# Altium PCB Tfinal.PcbDoc (part 2 of 3)
Units mm, origin at the board's own origin, x right, y up, seen from the top; angles counter-clockwise.
Board outline 152.4 x 101.6 mm, 2 copper layers (Top Layer, Bottom Layer); 134 components, 112 nets, 404 pads, 12 vias.
Unrouted connection lines stored in the file: 100.
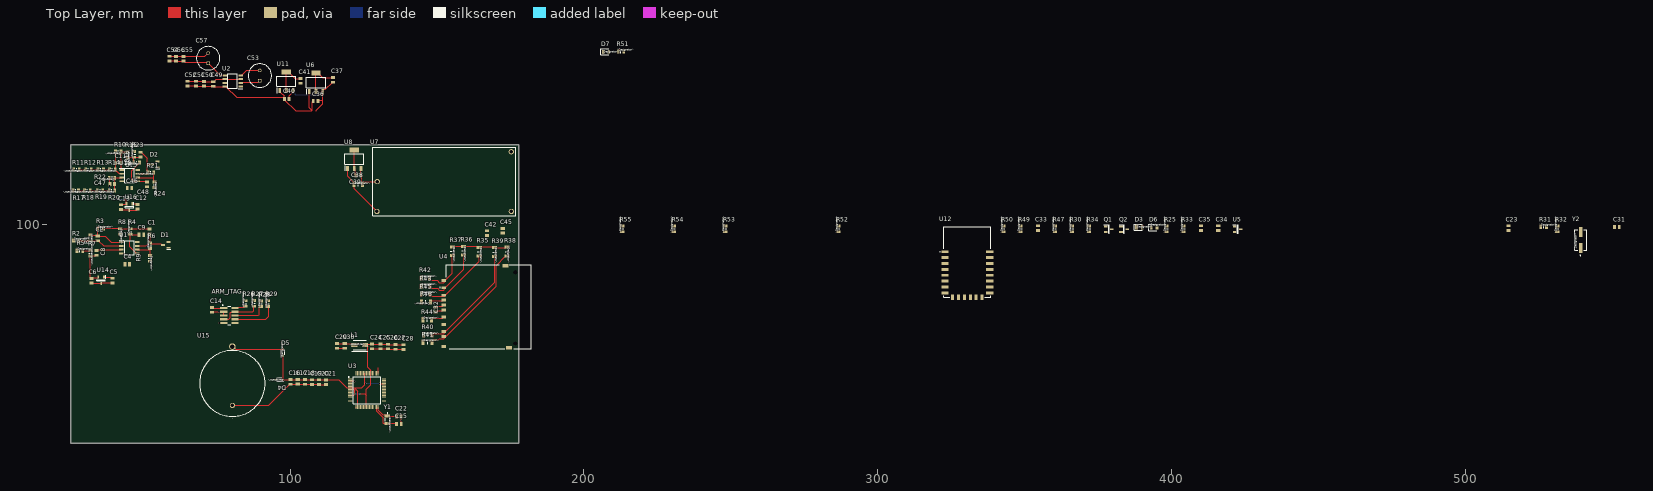
[diagram p0: Top Layer view]

## Part data (continued)
R1 R4 R7 R10 R16 R22: "YAGEO - RC0805FR-074K7L - SMD  0805 [2012 Metric], 4.7 kohm,  125 mW", Case/Package=0805, Case Code (Metric)=2012, Manufacturer 1=Yageo, Max Operating Temperature=155°C, Max Power Dissipation=125mW, Min Operating Temperature=-55°C, Package Quantity=5000, Resistance=4.7kR, Resistance Tolerance=1%, Resistor Type="Thick Film", Supplier Part Number 1=6181408, Temperature Coefficient=100ppm/°C, Voltage Rating=150V, Case Code (Imperial)=0805, ComponentLink1Description=https://datasheet.ciiva.com/11808/0900766b8106beab-11808155.pdf?src-supplier=RSComponents, ComponentLink1URL=https://datasheet.ciiva.com/11808/0900766b8106beab-11808155.pdf?src-supplier=RSComponents, ComponentLink2Description=https://datasheet.ciiva.com/6547/pyu-r-int-thick-7-6547263.pdf?src-supplier=Digi-Key, ComponentLink2URL=https://datasheet.ciiva.com/6547/pyu-r-int-thick-7-6547263.pdf?src-supplier=Digi-Key, ComponentLink3Description=https://datasheet.ciiva.com/7941/444164-7941806.pdf?src-supplier=Element14, ComponentLink3URL=https://datasheet.ciiva.com/7941/444164-7941806.pdf?src-supplier=Element14, ComponentLink4Description=https://datasheet.ciiva.com/46447/444164-46447583.pdf?src-supplier=Element14, ComponentLink4URL=https://datasheet.ciiva.com/46447/444164-46447583.pdf?src-supplier=Element14, ComponentLink5Description=https://datasheet.ciiva.com/7941/444164-7941804.pdf?src-supplier=Element14, ComponentLink5URL=https://datasheet.ciiva.com/7941/444164-7941804.pdf?src-supplier=Element14, ComponentLink6Description=https://datasheet.ciiva.com/7941/1686128-7941805.pdf?src-supplier=Element14, ComponentLink6URL=https://datasheet.ciiva.com/7941/1686128-7941805.pdf?src-supplier=Element14, Construction=Rectangular, Depth=1.25mm, Features="Moisture Resistant", Height=0.024inch, Lead Free="Lead Free", Length=0.079inch, Manufacturer Part Number 1=RC0805FR-074K7L, Military Standard=Not, Number of Pins=2, Number of Terminations=2, Packaging="Tape and Reel", Power Rating=125mW, Pricing 1="5000=0,00500 (GBP)", REACH SVHC="No SVHC", RoHS=Yes, RoHS Compliant=Yes, Series=RC, Size Code=0805, Stock 1=55000, Supplier 1=RSComponents, Technology="THICK FILM", Termination=SMD/SMT, Tolerance=1%, Voltage Rating (DC)=150V, Width=0.049inch
R2 R5: "Res Thick Film smd 0805 3.16K Ohm 1% 0.125W(1/8W)", Case/Package=0805, Case Code (Metric)=2012, Manufacturer 1=Yageo, Max Operating Temperature=155°C, Max Power Dissipation=125mW, Min Operating Temperature=-55°C, Package Quantity=1, Resistance=3.16kR, Resistor Type="Thick Film", Supplier Part Number 1=311-3.16KCRCT-ND, Temperature Coefficient=100ppm/°C, Tolerance=1%, Voltage Rating=150V, Case Code (Imperial)=0805, ComponentLink1Description=https://datasheet.ciiva.com/2457/pyu-r-int-thick-7-2457284.pdf?src-supplier=Digi-Key, ComponentLink1URL=https://datasheet.ciiva.com/2457/pyu-r-int-thick-7-2457284.pdf?src-supplier=Digi-Key, ComponentLink2Description=https://datasheet.ciiva.com/2457/pyu-r-int-thick-7-2457285.pdf?src-supplier=Digi-Key, ComponentLink2URL=https://datasheet.ciiva.com/2457/pyu-r-int-thick-7-2457285.pdf?src-supplier=Digi-Key, ComponentLink3Description=https://datasheet.ciiva.com/2457/pyu-r-int-thick-7-2457286.pdf?src-supplier=Digi-Key, ComponentLink3URL=https://datasheet.ciiva.com/2457/pyu-r-int-thick-7-2457286.pdf?src-supplier=Digi-Key, ComponentLink4Description=https://datasheet.ciiva.com/12577/rc0805-12577436.pdf?src-supplier=Mouser, ComponentLink4URL=https://datasheet.ciiva.com/12577/rc0805-12577436.pdf?src-supplier=Mouser, Construction=Rectangular, Depth=1.25mm, Features="Moisture Resistant", Height=0.024inch, Lead Free="Lead Free", Length=2mm, Manufacturer Part Number 1=RC0805FR-073K16L, Military Standard=Not, Number of Terminations=2, Packaging="Tape and Reel", Power Rating=125mW, Pricing 1="1=0,10000, 10=0,04200, 100=0,01690, 1000=0,00759, 2500=0,00659 (USD)", RoHS=Yes, RoHS Compliant=Yes, Series=RC, Size Code=0805, Stock 1=24399, Supplier 1=Digi-Key, Termination=SMD/SMT, Voltage Rating (DC)=150V, Weight=0.000194oz, Width=0.049inch
R3 R8 R15 R23: "Res Thick Film smd 0805 9.31K Ohm 1% 0.125W(1/8W)", Case/Package=0805, Case Code (Metric)=2012, Manufacturer 1=Yageo, Max Operating Temperature=155°C, Max Power Dissipation=125mW, Min Operating Temperature=-55°C, Package Quantity=1, Resistance=9.31kR, Resistor Type="Thick Film", Supplier Part Number 1=311-9.31KCRCT-ND, Temperature Coefficient=100ppm/°C, Tolerance=1%, Voltage Rating=150V, Case Code (Imperial)=0805, ComponentLink1Description=https://datasheet.ciiva.com/2457/pyu-r-int-thick-7-2457635.pdf?src-supplier=Digi-Key, ComponentLink1URL=https://datasheet.ciiva.com/2457/pyu-r-int-thick-7-2457635.pdf?src-supplier=Digi-Key, ComponentLink2Description=https://datasheet.ciiva.com/2457/pyu-r-int-thick-7-2457636.pdf?src-supplier=Digi-Key, ComponentLink2URL=https://datasheet.ciiva.com/2457/pyu-r-int-thick-7-2457636.pdf?src-supplier=Digi-Key, ComponentLink3Description=https://datasheet.ciiva.com/2457/pyu-r-int-thick-7-2457637.pdf?src-supplier=Digi-Key, ComponentLink3URL=https://datasheet.ciiva.com/2457/pyu-r-int-thick-7-2457637.pdf?src-supplier=Digi-Key, ComponentLink4Description=https://datasheet.ciiva.com/17074/rc0805-17074679.pdf?src-supplier=Future+Electronics, ComponentLink4URL=https://datasheet.ciiva.com/17074/rc0805-17074679.pdf?src-supplier=Future+Electronics, Construction=Rectangular, Contact Plating=Tin,Lead,Matte, Depth=1.25mm, Features="Moisture Resistant", Height=0.024inch, Lead Free="Lead Free", Length=2mm, Manufacturer Part Number 1=RC0805FR-079K31L, Military Standard=Not, Number of Terminations=2, Packaging="Tape and Reel", Power Rating=125mW, Pricing 1="1=0,10000, 10=0,04200, 100=0,01690, 1000=0,00759, 2500=0,00659 (USD)", Radiation Hardening=No, RoHS=Yes, RoHS Compliant=Yes, Series=RC, Size Code=0805, Stock 1=10181, Supplier 1=Digi-Key, Termination=SMD/SMT, Voltage Rating (DC)=150V, Width=1.25mm
R6 R9 R21 R24: "RES SMD  0805 10K OHM 1% 1/8W", Case/Package=0805, Case Code (Metric)=2012, Manufacturer 1=Yageo, Max Operating Temperature=155°C, Max Power Dissipation=125mW, Min Operating Temperature=-55°C, Package Quantity=1, Resistance=10kR, Resistance Tolerance=1%, Resistor Type="Thick Film", Supplier Part Number 1=311-10.0KCRCT-ND, Temperature Coefficient=100ppm/°C, Voltage Rating=150V, Case Code (Imperial)=0805, ComponentLink1Description=https://datasheet.ciiva.com/11808/0900766b8106beab-11808151.pdf?src-supplier=RSComponents, ComponentLink1URL=https://datasheet.ciiva.com/11808/0900766b8106beab-11808151.pdf?src-supplier=RSComponents, ComponentLink2Description=https://datasheet.ciiva.com/12669/rc0805-12669688.pdf?src-supplier=Mouser, ComponentLink2URL=https://datasheet.ciiva.com/12669/rc0805-12669688.pdf?src-supplier=Mouser, ComponentLink3Description=https://datasheet.ciiva.com/2456/pyu-r-int-thick-7-2456974.pdf?src-supplier=Digi-Key, ComponentLink3URL=https://datasheet.ciiva.com/2456/pyu-r-int-thick-7-2456974.pdf?src-supplier=Digi-Key, ComponentLink4Description=https://datasheet.ciiva.com/2456/pyu-r-int-thick-7-2456972.pdf?src-supplier=Digi-Key, ComponentLink4URL=https://datasheet.ciiva.com/2456/pyu-r-int-thick-7-2456972.pdf?src-supplier=Digi-Key, ComponentLink5Description=https://datasheet.ciiva.com/2456/pyu-r-int-thick-7-2456973.pdf?src-supplier=Digi-Key, ComponentLink5URL=https://datasheet.ciiva.com/2456/pyu-r-int-thick-7-2456973.pdf?src-supplier=Digi-Key, ComponentLink6Description=https://datasheet.ciiva.com/16747/rc0805-16747087.pdf?src-supplier=Future+Electronics, ComponentLink6URL=https://datasheet.ciiva.com/16747/rc0805-16747087.pdf?src-supplier=Future+Electronics, ComponentLink7Description=https://datasheet.ciiva.com/46447/444164-46447563.pdf?src-supplier=Element14, ComponentLink7URL=https://datasheet.ciiva.com/46447/444164-46447563.pdf?src-supplier=Element14, Construction=Rectangular, Depth=1.25mm, Features="Moisture Resistant", Height=0.024inch, Lead Free="Lead Free", Length=2mm, Manufacturer Part Number 1=RC0805FR-0710KL, Military Standard=Not, Number of Terminations=2, Packaging="Tape and Reel", Power Rating=125mW, Pricing 1="1=0,10000, 10=0,04200, 100=0,01690, 1000=0,00759, 2500=0,00659 (USD)", REACH SVHC=Unknown, RoHS=Yes, RoHS Compliant=Yes, Series=RC, Size Code=0805, Stock 1=7813114, Supplier 1=Digi-Key, Technology="THICK FILM", Termination=SMD/SMT, Tolerance=1%, Width=0.049inch
R11 R12 R13 R17 R18 R19: "RES SMD 0805 412K OHM 1% 1/8W", Case/Package=0805, Case Code (Metric)=2012, Manufacturer 1=Yageo, Max Operating Temperature=155°C, Max Power Dissipation=125mW, Min Operating Temperature=-55°C, Resistance=412kR, Resistor Type="Thick Film", Supplier Part Number 1=311-412KCRCT-ND, Temperature Coefficient=100ppm/°C, Tolerance=1%, Voltage Rating=150V, Case Code (Imperial)=0805, ComponentLink1Description=http://www.mouser.com/ds/2/447/Yageo_08112016_RC0805-968729.pdf?src-supplier=Mouser, ComponentLink1URL=http://www.mouser.com/ds/2/447/Yageo_08112016_RC0805-968729.pdf?src-supplier=Mouser, ComponentLink2Description=http://components.arrow.com/part/dataview/0323_03542655?src-supplier=Arrow+Europe, ComponentLink2URL=http://components.arrow.com/part/dataview/0323_03542655?src-supplier=Arrow+Europe, ComponentLink3Description=http://www.yageo.com/documents/recent/PYu-RC_Group_51_RoHS_L_9.pdf?src-supplier=Digi-Key, ComponentLink3URL=http://www.yageo.com/documents/recent/PYu-RC_Group_51_RoHS_L_9.pdf?src-supplier=Digi-Key, ComponentLink4Description=http://www.yageo.com/documents/recent/PYu-RC_Group_51_RoHS_L_10.pdf?src-supplier=Digi-Key, ComponentLink4URL=http://www.yageo.com/documents/recent/PYu-RC_Group_51_RoHS_L_10.pdf?src-supplier=Digi-Key, ComponentLink5Description=http://www.yageo.com/documents/recent/PYu-RC0805_51_RoHS_L_v5.pdf?src-supplier=Future+Electronics, ComponentLink5URL=http://www.yageo.com/documents/recent/PYu-RC0805_51_RoHS_L_v5.pdf?src-supplier=Future+Electronics, Construction=Rectangular, Depth=1.25mm, Features="Moisture Resistant", Height=0.5mm, Lead Free="Lead Free", Length=2mm, Manufacturer Part Number 1=RC0805FR-07412KL, Military Standard=Not, Number of Terminations=2, Packaging="Tape and Reel", Power Rating=125mW, Pricing 1="1=0,10000, 10=0,04200, 100=0,01690, 1000=0,00759, 2500=0,00659 (USD)", RoHS=Yes, RoHS Compliant=Yes, Series=RC, Stock 1=1412, Supplier 1=Digi-Key, Technology="THICK FILM", Termination=SMD/SMT, Voltage Rating (DC)=150V, Width=1.25mm, Working Voltage=150V
R14 R20: "Res Thick Film smd 0805 15.8K Ohm 1% 0.125W(1/8W)", Case/Package=0805, Case Code (Metric)=2012, Manufacturer 1=Yageo, Max Operating Temperature=155°C, Max Power Dissipation=125mW, Min Operating Temperature=-55°C, Resistance=15.8kR, Resistor Type="Thick Film", Supplier Part Number 1=311-15.8KCRCT-ND, Temperature Coefficient=100ppm/°C, Tolerance=1%, Voltage Rating=150V, Case Code (Imperial)=0805, ComponentLink1Description=https://datasheet.ciiva.com/5558/rc0805-5558198.pdf?src-supplier=Mouser, ComponentLink1URL=https://datasheet.ciiva.com/5558/rc0805-5558198.pdf?src-supplier=Mouser, ComponentLink2Description=https://datasheet.ciiva.com/17054/rc0805-17054650.pdf?src-supplier=Future+Electronics, ComponentLink2URL=https://datasheet.ciiva.com/17054/rc0805-17054650.pdf?src-supplier=Future+Electronics, Construction=Rectangular, Contact Plating=Tin,Matte,Lead, Depth=1.25mm, Features="Moisture Resistant", Lead Free="Lead Free", Length=2mm, Manufacturer Part Number 1=RC0805FR-0715K8L, Military Standard=Not, Number of Terminations=2, Packaging="Tape and Reel", Power Rating=125mW, Pricing 1="1=0,10000, 10=0,04200, 100=0,01690, 1000=0,00759, 2500=0,00659 (USD)", Radiation Hardening=No, RoHS=Yes, RoHS Compliant=Yes, Series=RC, Size Code=0805, Stock 1=65412, Supplier 1=Digi-Key, Termination=SMD/SMT, Voltage Rating (DC)=150V
R25 R33 R51: "Res Thick Film smd 0805 130 Ohm 1% 0.125W(", Case/Package=0805, Case Code (Metric)=2012, Manufacturer 1=Yageo, Max Operating Temperature=155°C, Max Power Dissipation=125mW, Min Operating Temperature=-55°C, Package Quantity=1, Resistance=130R, Resistor Type="Thick Film", Supplier Part Number 1=311-130CRCT-ND, Temperature Coefficient=100ppm/°C, Tolerance=1%, Voltage Rating=150V, Case Code (Imperial)=0805, ComponentLink1Description=https://datasheet.ciiva.com/11808/0900766b8106beab-11808374.pdf?src-supplier=RSComponents, ComponentLink1URL=https://datasheet.ciiva.com/11808/0900766b8106beab-11808374.pdf?src-supplier=RSComponents, ComponentLink2Description=https://datasheet.ciiva.com/2457/pyu-r-int-thick-7-2457546.pdf?src-supplier=Digi-Key, ComponentLink2URL=https://datasheet.ciiva.com/2457/pyu-r-int-thick-7-2457546.pdf?src-supplier=Digi-Key, ComponentLink3Description=https://datasheet.ciiva.com/2457/pyu-r-int-thick-7-2457547.pdf?src-supplier=Digi-Key, ComponentLink3URL=https://datasheet.ciiva.com/2457/pyu-r-int-thick-7-2457547.pdf?src-supplier=Digi-Key, ComponentLink4Description=https://datasheet.ciiva.com/2457/pyu-r-int-thick-7-2457545.pdf?src-supplier=Digi-Key, ComponentLink4URL=https://datasheet.ciiva.com/2457/pyu-r-int-thick-7-2457545.pdf?src-supplier=Digi-Key, ComponentLink5Description=https://datasheet.ciiva.com/15189/getdatasheetpartid-326400-15189899.pdf?src-supplier=Verical, ComponentLink5URL=https://datasheet.ciiva.com/15189/getdatasheetpartid-326400-15189899.pdf?src-supplier=Verical, ComponentLink6Description=https://datasheet.ciiva.com/16746/rc0805-16746879.pdf?src-supplier=Future+Electronics, ComponentLink6URL=https://datasheet.ciiva.com/16746/rc0805-16746879.pdf?src-supplier=Future+Electronics, Construction=Rectangular, Depth=1.25mm, Features="Moisture Resistant", Height=0.5mm, Lead Free="Lead Free", Length=2mm, Manufacturer Part Number 1=RC0805FR-07130RL, Military Standard=Not, Mount="Surface Mount", Number of Terminations=2, Packaging="Tape and Reel", Power Rating=125mW, Pricing 1="1=0,10000, 10=0,04200, 100=0,01690, 1000=0,00759, 2500=0,00659 (USD)", RoHS=Yes, RoHS Compliant=Yes, Series=RC, Size Code=0805, Stock 1=289647, Supplier 1=Digi-Key, Technology="THICK FILM", Termination=SMD/SMT, Voltage Rating (DC)=150V, Width=0.049inch
R26 R27 R28 R29 R47: "Thick Film Resistors - SMD 0805  100K ohm 5% 1/8W", Case/Package=0805, Case Code (Metric)=2012, Manufacturer 1=Yageo, Max Operating Temperature=155°C, Max Power Dissipation=125mW, Min Operating Temperature=-55°C, Resistance=100kR, Resistor Type="Thick Film", Supplier Part Number 1=YAG3756CT-ND, Temperature Coefficient=100ppm/°C, Tolerance=5%, Voltage Rating=150V, Case Code (Imperial)=0805, ComponentLink1Description=https://datasheet.ciiva.com/12576/pyu-ac-51-rohs-l-2-12576604.pdf?src-supplier=Mouser, ComponentLink1URL=https://datasheet.ciiva.com/12576/pyu-ac-51-rohs-l-2-12576604.pdf?src-supplier=Mouser, Features="Moisture Resistant,Automotive AEC-Q200", Height=0.024inch, Length=0.079inch, Manufacturer Part Number 1=AC0805JR-07100KL, Number of Terminations=2, Packaging="Tape and Reel", Power Rating=125mW, Pricing 1="1=0,10000, 10=0,04300, 100=0,01730, 1000=0,00777, 2500=0,00674 (USD)", RoHS=Yes, RoHS Compliant=Yes, Series=AC, Stock 1=23, Supplier 1=Digi-Key, Termination=SMD/SMT, Weight=0.000194oz, Width=0.049inch
R30 R31 R32 R34 R52 R53 R54 R55: "Res Thick Film smd 0805 10K Ohm 5% 1/8W", Case/Package=0805, Case Code (Metric)=2012, Manufacturer 1=Yageo, Max Operating Temperature=155°C, Max Power Dissipation=125mW, Min Operating Temperature=-55°C, Resistance=10kR, Resistance Tolerance=5%, Resistor Type="Thick Film", Supplier Part Number 1=311-10KARCT-ND, Temperature Coefficient=100ppm/°C, Voltage Rating=150V, Case Code (Imperial)=0805, ComponentLink1Description=https://datasheet.ciiva.com/7941/444164-7941870.pdf?src-supplier=Element14, ComponentLink1URL=https://datasheet.ciiva.com/7941/444164-7941870.pdf?src-supplier=Element14, ComponentLink2Description=https://datasheet.ciiva.com/7941/444164-7941871.pdf?src-supplier=Element14, ComponentLink2URL=https://datasheet.ciiva.com/7941/444164-7941871.pdf?src-supplier=Element14, ComponentLink3Description=https://datasheet.ciiva.com/7983/444164-7983765.pdf?src-supplier=Element14, ComponentLink3URL=https://datasheet.ciiva.com/7983/444164-7983765.pdf?src-supplier=Element14, Construction=Rectangular, Contact Plating=Tin,Matte, Depth=1.25mm, Features="Moisture Resistant", Height=0.5mm, Lead Free="Lead Free", Length=2mm, Manufacturer Part Number 1=RC0805JR-0710KL, Military Standard=Not, Number of Terminations=2, Packaging="Tape and Reel", Power Rating=125mW, Pricing 1="1=0,10000, 10=0,03600, 100=0,01450, 1000=0,00652, 2500=0,00566 (USD)", Radiation Hardening=No, REACH SVHC=Unknown, RoHS=Yes, RoHS Compliant=Yes, Series=RC, Size Code=0805, Stock 1=2124400, Supplier 1=Digi-Key, Termination=SMD/SMT, Tolerance=5%, Width=1.25mm
R35: library part RC1206FR-0710KL, "Res Thick Film smd 1206 10K Ohm 1% 0.25W(1/4W)", Case/Package=1206, Case Code (Metric)=3216, Manufacturer 1=Yageo, Max Operating Temperature=155°C, Max Power Dissipation=250mW, Min Operating Temperature=-55°C, Resistance=68kR, Resistance Tolerance=5%, Resistor Type="Thick Film", Supplier Part Number 1=311-68KERCT-ND, Temperature Coefficient=100ppm/°C, Voltage Rating=200V, Case Code (Imperial)=1206, ComponentLink1Description=https://datasheet.ciiva.com/7857/444357-7857527.pdf?src-supplier=Element14, ComponentLink1URL=https://datasheet.ciiva.com/7857/444357-7857527.pdf?src-supplier=Element14, ComponentLink2Description=https://datasheet.ciiva.com/7857/444357-7857528.pdf?src-supplier=Element14, ComponentLink2URL=https://datasheet.ciiva.com/7857/444357-7857528.pdf?src-supplier=Element14, Construction=Rectangular, Depth=1.6mm, Features="Moisture Resistant", Lead Free="Lead Free", Length=3.1mm, Manufacturer Part Number 1=RC1206JR-0768KL, Military Standard=Not, Number of Terminations=2, Packaging="Tape and Reel", Power Rating=250mW, Pricing 1="1=0,10000, 10=0,06300, 100=0,02580, 1000=0,01158, 2500=0,01005 (USD)", REACH SVHC="No SVHC", RoHS=Yes, RoHS Compliant=Yes, Series=RC, Size Code=1206, Stock 1=38664, Supplier 1=Digi-Key, Termination=SMD/SMT, Tolerance=5%
R36 R37 R38 R39: "Thick Film Resistors smd 1206(3216) 68K OHM 5% 250mW", Case/Package=1206, Case Code (Metric)=3216, Manufacturer 1=Yageo, Max Operating Temperature=155°C, Max Power Dissipation=250mW, Min Operating Temperature=-55°C, Resistance=68kR, Resistance Tolerance=5%, Resistor Type="Thick Film", Supplier Part Number 1=311-68KERCT-ND, Temperature Coefficient=100ppm/°C, Voltage Rating=200V, Case Code (Imperial)=1206, ComponentLink1Description=https://datasheet.ciiva.com/7857/444357-7857527.pdf?src-supplier=Element14, ComponentLink1URL=https://datasheet.ciiva.com/7857/444357-7857527.pdf?src-supplier=Element14, ComponentLink2Description=https://datasheet.ciiva.com/7857/444357-7857528.pdf?src-supplier=Element14, ComponentLink2URL=https://datasheet.ciiva.com/7857/444357-7857528.pdf?src-supplier=Element14, Construction=Rectangular, Depth=1.6mm, Features="Moisture Resistant", Lead Free="Lead Free", Length=3.1mm, Manufacturer Part Number 1=RC1206JR-0768KL, Military Standard=Not, Number of Terminations=2, Packaging="Tape and Reel", Power Rating=250mW, Pricing 1="1=0,10000, 10=0,06300, 100=0,02580, 1000=0,01158, 2500=0,01005 (USD)", REACH SVHC="No SVHC", RoHS=Yes, RoHS Compliant=Yes, Series=RC, Size Code=1206, Stock 1=38664, Supplier 1=Digi-Key, Termination=SMD/SMT, Tolerance=5%
R40 R41 R42 R43 R44 R45 R46: "Thick Film Resistors SMD 1206 (3264)  100 OHM 5% 250mW", Case/Package=1206, Case Code (Metric)=3216, Manufacturer 1=Yageo, Max Operating Temperature=155°C, Max Power Dissipation=250mW, Min Operating Temperature=-55°C, Package Quantity=5000, Resistance=100R, Resistance Tolerance=5%, Resistor Type="Thick Film", Supplier Part Number 1=311-100ERCT-ND, Temperature Coefficient=100ppm/°C, Voltage Rating=200V, Case Code (Imperial)=1206, ComponentLink1Description=https://datasheet.ciiva.com/29181/402427-da-01-en-smd-widerstand-chip1206-100-ohm-29181432.pdf?src-supplier=Conrad, ComponentLink1URL=https://datasheet.ciiva.com/29181/402427-da-01-en-smd-widerstand-chip1206-100-ohm-29181432.pdf?src-supplier=Conrad, ComponentLink2Description=https://datasheet.ciiva.com/2458/pyu-rc1206-51-rohs-l-4-2458710.pdf?src-supplier=Digi-Key, ComponentLink2URL=https://datasheet.ciiva.com/2458/pyu-rc1206-51-rohs-l-4-2458710.pdf?src-supplier=Digi-Key, ComponentLink3Description=https://datasheet.ciiva.com/2458/pyu-rc1206-51-rohs-l-4-2458711.pdf?src-supplier=Digi-Key, ComponentLink3URL=https://datasheet.ciiva.com/2458/pyu-rc1206-51-rohs-l-4-2458711.pdf?src-supplier=Digi-Key, ComponentLink4Description=https://datasheet.ciiva.com/2458/pyu-rc1206-51-rohs-l-4-2458712.pdf?src-supplier=Digi-Key, ComponentLink4URL=https://datasheet.ciiva.com/2458/pyu-rc1206-51-rohs-l-4-2458712.pdf?src-supplier=Digi-Key, ComponentLink5Description=https://datasheet.ciiva.com/16772/pyu-rc1206-51-rohs-l-4-16772235.pdf?src-supplier=Future+Electronics, ComponentLink5URL=https://datasheet.ciiva.com/16772/pyu-rc1206-51-rohs-l-4-16772235.pdf?src-supplier=Future+Electronics, Construction=Rectangular, Depth=1.6mm, Height=0.026inch, Lead Free="Lead Free", Length=0.122inch, Manufacturer Part Number 1=RC1206JR-07100RL, Military Standard=Not, Number of Terminations=2, Packaging="Tape and Reel", Power Rating=250mW, Pricing 1="1=0,10000, 10=0,06300, 100=0,02580, 1000=0,01158, 2500=0,01005 (USD)", REACH SVHC=Unknown, RoHS=Yes, RoHS Compliant=Yes, Series=RC1206, Size Code=1206, Stock 1=1229853, Supplier 1=Digi-Key, Termination=SMD/SMT, Tolerance=5%, Width=0.063inch
R49 R50: "Res Thick Film smd  0805 22 Ohm 5% 1/8W", Case/Package=0805, Case Code (Metric)=2012, Manufacturer 1=Yageo, Max Operating Temperature=155°C, Max Power Dissipation=125mW, Min Operating Temperature=-55°C, Resistance=22R, Resistance Tolerance=5%, Resistor Type="Thick Film", Supplier Part Number 1=311-22ARCT-ND, Temperature Coefficient=100ppm/°C, Voltage Rating=150V, Case Code (Imperial)=0805, ComponentLink1Description=http://www.mouser.com/ds/2/447/Yageo_08112016_RC0805-968729.pdf?src-supplier=Mouser, ComponentLink1URL=http://www.mouser.com/ds/2/447/Yageo_08112016_RC0805-968729.pdf?src-supplier=Mouser, ComponentLink2Description=http://www.farnell.com/datasheets/2167052.pdf?src-supplier=Farnell, ComponentLink2URL=http://www.farnell.com/datasheets/2167052.pdf?src-supplier=Farnell, ComponentLink3Description=http://components.arrow.com/part/dataview/0323_00047573?src-supplier=Arrow+Europe, ComponentLink3URL=http://components.arrow.com/part/dataview/0323_00047573?src-supplier=Arrow+Europe, ComponentLink4Description=http://www.farnell.com/datasheets/444164.pdf?src-supplier=Farnell, ComponentLink4URL=http://www.farnell.com/datasheets/444164.pdf?src-supplier=Farnell, ComponentLink5Description=http://www.yageo.com/documents/recent/PYu-RC_Group_51_RoHS_L_10.pdf?src-supplier=Digi-Key, ComponentLink5URL=http://www.yageo.com/documents/recent/PYu-RC_Group_51_RoHS_L_10.pdf?src-supplier=Digi-Key, ComponentLink6Description=http://www.yageo.com/documents/recent/PYu-RC_Group_51_RoHS_L_9.pdf?src-supplier=Digi-Key, ComponentLink6URL=http://www.yageo.com/documents/recent/PYu-RC_Group_51_RoHS_L_9.pdf?src-supplier=Digi-Key, ComponentLink7Description=http://www.yageo.com/pdf/PYu-RC0805_51_RoHS_L_4.pdf?src-supplier=Avnet, ComponentLink7URL=http://www.yageo.com/pdf/PYu-RC0805_51_RoHS_L_4.pdf?src-supplier=Avnet, ComponentLink8Description=http://www.yageo.com/documents/recent/PYu-RC0805_51_RoHS_L_5.pdf?src-supplier=Avnet+Europe, ComponentLink8URL=http://www.yageo.com/documents/recent/PYu-RC0805_51_RoHS_L_5.pdf?src-supplier=Avnet+Europe, ComponentLink9Description=http://www.farnell.com/datasheets/442941.pdf?src-supplier=Element14, ComponentLink9URL=http://www.farnell.com/datasheets/442941.pdf?src-supplier=Element14, ComponentLink10Description=http://www.yageo.ru/pdf/RC0805.pdf?src-supplier=Future+Electronics, ComponentLink10URL=http://www.yageo.ru/pdf/RC0805.pdf?src-supplier=Future+Electronics, ComponentLink11Description=http://www.farnell.com/datasheets/2167052.pdf?src-supplier=Newark, ComponentLink11URL=http://www.farnell.com/datasheets/2167052.pdf?src-supplier=Newark, ComponentLink12Description=http://www.farnell.com/datasheets/444164.pdf?src-supplier=Element14, ComponentLink12URL=http://www.farnell.com/datasheets/444164.pdf?src-supplier=Element14, Construction=Rectangular, Contact Plating=Tin,Matte,Lead, Depth=1.25mm, Features="Moisture Resistant", Lead Free="Lead Free", Length=2mm, Manufacturer Part Number 1=RC0805JR-0722RL, Military Standard=Not, Number of Terminations=2, Packaging="Tape and Reel", Power Rating=125mW, Pricing 1="1=0,10000, 10=0,03600, 100=0,01450, 1000=0,00652, 2500=0,00566 (USD)", Radiation Hardening=No, REACH SVHC=Unknown, RoHS=Yes, Series=RC, Size Code=0805, Stock 1=938847, Supplier 1=Digi-Key, Termination=SMD/SMT, Tolerance=5%
U1 U13: "IC OPAMP GP 2.8MHZ RRO 8SOIC", Case/Package=D, Input Bias Current=50pA, Input Offset Voltage (Vos)=2.2mV, Manufacturer 1="Texas Instruments", Max Dual Supply Voltage=3V, Max Operating Temperature=125°C, Max Supply Voltage=6V, Min Dual Supply Voltage=1.35V, Min Operating Temperature=-40°C, Min Supply Voltage=2.7V, Nominal Supply Current=1.8mA, Operating Supply Current=600uA, Output Current=35mA, Package Quantity=2500, Power Dissipation=710mW, Supplier Part Number 1=296-2440-1-ND, Voltage Gain=120dB, Amplifier Type="GENERAL PURPOSE", Bandwidth=2.8MHz, Common Mode Rejection Ratio=61dB, ComponentLink1Description=https://datasheet.ciiva.com/14461/tlv2475a-14461901.pdf?src-supplier=Avnet, ComponentLink1URL=https://datasheet.ciiva.com/14461/tlv2475a-14461901.pdf?src-supplier=Avnet, ComponentLink2Description=https://datasheet.ciiva.com/1798/tlv2470a-1798989.pdf?src-supplier=Digi-Key, ComponentLink2URL=https://datasheet.ciiva.com/1798/tlv2470a-1798989.pdf?src-supplier=Digi-Key, ComponentLink3Description=https://datasheet.ciiva.com/1798/tlv2470a-1798990.pdf?src-supplier=Digi-Key, ComponentLink3URL=https://datasheet.ciiva.com/1798/tlv2470a-1798990.pdf?src-supplier=Digi-Key, ComponentLink4Description=https://datasheet.ciiva.com/1798/tlv2470a-1798991.pdf?src-supplier=Digi-Key, ComponentLink4URL=https://datasheet.ciiva.com/1798/tlv2470a-1798991.pdf?src-supplier=Digi-Key, ComponentLink5Description=https://datasheet.ciiva.com/26226/tlv2475a-26226351.pdf?src-supplier=Avnet+Europe, ComponentLink5URL=https://datasheet.ciiva.com/26226/tlv2475a-26226351.pdf?src-supplier=Avnet+Europe, ComponentLink6Description=https://datasheet.ciiva.com/48711/001071769-da-01-en-ic-opamp-gp-r-r-2-tlv2472cdr-soic-8-tid-48711766.pdf?src-supplier=Conrad, ComponentLink6URL=https://datasheet.ciiva.com/48711/001071769-da-01-en-ic-opamp-gp-r-r-2-tlv2472cdr-soic-8-tid-48711766.pdf?src-supplier=Conrad, Gain Bandwidth Product=2.8MHz, Lead Free="Lead Free", Max I/O Voltage=2.2mV, Number of Channels=2, Number of Circuits=2, Number of Elements=2, Number of Pins=8, Operating Supply Voltage=3V, Output Current per Channel=35mA, Packaging="Tape and Reel", Pricing 1="1=2,73000, 10=2,45200, 25=2,31360, 100=1,97110, 250=1,85076, 500=1,61942, 1000=1,52775 (USD)", Radiation Hardening=No, RoHS=Yes, RoHS Compliant=Yes, Slew Rate=1.4V/µs, Stock 1=5061, Supplier 1=Digi-Key, Supply Current=1.8mA, Technology=CMOS, Unity Gain Bandwidth Product=2.8MHz
U2: "Charge Pump INV/STPUP -1.5V to -5.5V 120mA 8-Pin SOIC T/R", Case/Package=SOIC, Manufacturer 1="TI National Semiconductor", Max Input Voltage=5.5V, Max Operating Temperature=85°C, Min Input Voltage=1.5V, Min Operating Temperature=-40°C, Operating Supply Current=16mA, Output Current=100mA, Output Voltage=-5.5V, Quiescent Current=1mA, Supplier Part Number 1=LM2660MX/NOPBCT-ND, Switching Frequency=40kHz, ComponentLink1Description=https://datasheet.ciiva.com/26909/getdatasheetpartid-767710-26909758.pdf?src-supplier=Verical, ComponentLink1URL=https://datasheet.ciiva.com/26909/getdatasheetpartid-767710-26909758.pdf?src-supplier=Verical, ComponentLink2Description=https://datasheet.ciiva.com/6594/lm2660-6594222.pdf?src-supplier=Digi-Key, ComponentLink2URL=https://datasheet.ciiva.com/6594/lm2660-6594222.pdf?src-supplier=Digi-Key, Contact Plating=Tin,Matte, Lead Free="Lead Free", Logic Function=Inverting, Manufacturer Part Number 1=LM2660MX/NOPB, Max Supply Voltage=5.5V, Min Supply Voltage=1.5V, Mount="Surface Mount", Number of Outputs=1, Number of Pins=8, Packaging="Tape and Reel", Pricing 1="1=1,66000, 10=1,49400, 25=1,40960, 100=1,20110, 250=1,12784, 500=0,98686, 1000=0,93100 (USD)", Radiation Hardening=No, RoHS=Yes, RoHS Compliant=Yes, Stock 1=13332, Supplier 1=Digi-Key, Synchronous Rectifier=No, Weight=0.006596oz
U3: "MICROCONTROLLER MCU, 32 BIT, CORTEX-M4, 120MHZ, LQFP-64; Architecture:ARM Cortex-M4; CPU Speed:120MHz; Program Memory Size:512KB; RAM Memory Size:128KB; No. of Pins:64; MCU Case Style:LQFP; No. of I/Os:47; Supply Voltage Min:1.62V ;RoHS Compliant: Yes", Case/Package=LQFP, Frequency=120MHz, Manufacturer 1="Microchip / Atmel", Max Frequency=32MHz, Max Operating Temperature=85°C, Max Supply Voltage=3.6V, Min Operating Temperature=-40°C, Min Supply Voltage=1.62V, Package Quantity=160, Supplier Part Number 1=ATSAM4S8BA-AU-TRAY, ComponentLink1Description=https://datasheet.ciiva.com/12272/doc11100-52688-12272160.pdf?src-supplier=Mouser, ComponentLink1URL=https://datasheet.ciiva.com/12272/doc11100-52688-12272160.pdf?src-supplier=Mouser, ComponentLink2Description=https://datasheet.ciiva.com/30476/0900766b811a941e-30476054.pdf?src-supplier=RSComponents, ComponentLink2URL=https://datasheet.ciiva.com/30476/0900766b811a941e-30476054.pdf?src-supplier=RSComponents, ComponentLink3Description=https://datasheet.ciiva.com/8010/1653605-8010699.pdf?src-supplier=Element14, ComponentLink3URL=https://datasheet.ciiva.com/8010/1653605-8010699.pdf?src-supplier=Element14, Core Architecture=ARM, Data Bus Width=32b, Height=1.6mm, Interface=I2C,SPI,USB,IrDA,MMC,UART,USART, Lead Free="Lead Free", Length=12mm, Manufacturer Part Number 1=ATSAM4S8BA-AU, Memory Size=512KB, Memory Type=FLASH,ROM, Mount="Surface Mount", Number of ADC Channels=11, Number of I2C Channels=2, Number of I/Os=47, Number of Pins=64, Number of PWM Channels=4, Number of SPI Channels=1, Number of Timers/Counters=2, Number of UART Channels=2, Number of USB Channels=1, Oscillator Type=Internal, Packaging=Tray, Peripherals="Brown-out Detect/Reset,POR,PWM,WDT,DMA", Radiation Hardening=No, RAM Size=128KB, REACH SVHC="No SVHC", RoHS=Yes, RoHS Compliant=Yes, Series=SAM4S, Stock 1=0, Supplier 1="Future Electronics", Watchdog Timer=Yes, Width=10mm
U4: "Conn; Data; SD (SanDisk Memory) Card Reader; Push - Push Type", Manufacturer 1="Amphenol ICC", Supplier Part Number 1=70248486, ComponentLink1Description=http://www.farnell.com/cad/1912985.pdf?src-supplier=Farnell, ComponentLink1URL=http://www.farnell.com/cad/1912985.pdf?src-supplier=Farnell, ComponentLink2Description=http://www.farnell.com/cad/1912985.pdf?src-supplier=Element14, ComponentLink2URL=http://www.farnell.com/cad/1912985.pdf?src-supplier=Element14, ComponentLink3Description=http://www.farnell.com/datasheets/2562281.pdf?src-supplier=Newark, ComponentLink3URL=http://www.farnell.com/datasheets/2562281.pdf?src-supplier=Newark, ComponentLink4Description=aa, ComponentLink4URL=https://www.amphenol-icc.com/media/wysiwyg/files/drawing/10067847.pdf, Manufacturer Part Number 1=10067847-001RLF, RoHS=Yes, RoHS Compliant=Yes, Stock 1=0, Supplier 1="Allied Electronics"
U5: "INTERSIL         ISL21010CFH330Z-TK             Voltage Reference, Precision Micropower, Series - Fixed, ISL21010 Series, 3V, SOT-23-3", Case/Package=SOT-23, Manufacturer 1=Intersil, Max Input Voltage=6.5V, Max Operating Temperature=125°C, Max Output Current=25mA, Max Output Voltage=3V, Max Supply Current=100uA, Max Supply Voltage=5.5V, Min Operating Temperature=-40°C, Package Quantity=1000, Quiescent Current=80uA, Temperature Coefficient=50ppm/°C, Tolerance=0.2%, ComponentLink1Description=https://datasheet.ciiva.com/1172/1599533-1172856.pdf?src-supplier=Element14, ComponentLink1URL=https://datasheet.ciiva.com/1172/1599533-1172856.pdf?src-supplier=Element14, Height=0.91mm, Length=2.92mm, Manufacturer Part Number 1=ISL21010CFH330Z-TK, Mount="Surface Mount", Number of Channels=1, Number of Pins=3, Output Current=25mA, Output Voltage=3V, Packaging="Tape and Reel", Pricing 1="2000=0,81760, 4000=0,80080, 6000=0,78400, 10000=0,76720, 20000=0,75040, 100000=0,73360, 200000=0,71680 (USD)", Radiation Hardening=No, REACH SVHC="No SVHC", Reference Type=Series,Fixed, Reference Voltage=3V, RoHS=Yes, RoHS Compliant=Yes, Series=ISL21010CFH330, Stock 1=0, Supplier 1=Avnet, Supplier Part Number 1=ISL21010CFH330Z-TK, Width=1.3mm
U6 U11: "LDO Regulator Pos 3.3V 0.8A 4-Pin(3+Tab) SOT-223 T/R", Case/Package=SOT-223, Dropout Voltage=1.2V, Manufacturer 1="TI National Semiconductor", Max Input Voltage=15V, Max Operating Temperature=125°C, Max Output Current=800mA, Max Output Voltage=3.3V, Max Supply Voltage=10V, Min Input Voltage=4.5V, Min Operating Temperature=0°C, Min Supply Voltage=4.75V, Output Voltage Accuracy=1%, Quiescent Current=10mA, Accuracy=1%, ComponentLink1Description=https://datasheet.ciiva.com/1511/1685500-1511708.pdf?src-supplier=Element14, ComponentLink1URL=https://datasheet.ciiva.com/1511/1685500-1511708.pdf?src-supplier=Element14, ComponentLink2Description=https://datasheet.ciiva.com/26904/lm1117mp-3-3-26904890.pdf?src-supplier=IIIC, ComponentLink2URL=https://datasheet.ciiva.com/26904/lm1117mp-3-3-26904890.pdf?src-supplier=IIIC, ComponentLink3Description=https://datasheet.ciiva.com/14275/lm1117-n-14275231.pdf?src-supplier=Avnet, ComponentLink3URL=https://datasheet.ciiva.com/14275/lm1117-n-14275231.pdf?src-supplier=Avnet, ComponentLink4Description=https://datasheet.ciiva.com/1511/1685500-1511709.pdf?src-supplier=Element14, ComponentLink4URL=https://datasheet.ciiva.com/1511/1685500-1511709.pdf?src-supplier=Element14, Manufacturer Part Number 1=LM1117MP-3.3, Mount="Surface Mount", Nominal Output Voltage=3.3V, Number of Outputs=1, Number of Pins=4, Output Current=800mA, Output Type=Fixed, Output Voltage=3.3V, Packaging="Tape and Reel", Polarity=Positive, Radiation Hardening=No, REACH SVHC="No SVHC", RoHS=No, RoHS Compliant=No, Stock 1=0, Supplier 1="Arrow Electronics", Supplier Part Number 1=LM1117MP-3.3, Voltage=3.3V
U7: "AC/DC CONVERTER 12V 10W", Manufacturer 1=CUI, Max Operating Temperature=70°C, Max Output Current=850mA, Max Power Dissipation=10W, Min Operating Temperature=-25°C, Supplier Part Number 1=102-4145-ND, Voltage - Output 1=12V, Approvals=CE,cURus, ComponentLink1Description=https://www.cui.com/product/resource/digikeypdf/vof-10b.pdf?src-supplier=Digi-Key, ComponentLink1URL=https://www.cui.com/product/resource/digikeypdf/vof-10b.pdf?src-supplier=Digi-Key, Efficiency=82.32%, Manufacturer Part Number 1=VOF-10B-S12, Mount="Through Hole", Number of Outputs=1, Pricing 1="1=12,02000, 5=11,85000, 10=11,67900, 25=10,99200, 50=10,64840, 100=10,30500, 250=9,96152, 500=9,61800 (USD)", RoHS=Yes, RoHS Compliant=Yes, Stock 1=0, Supplier 1=Digi-Key
U8: library part LM1117MP-5.0/NOPB, "Space saving 800-mA low-dropout linear regulator with internal current limit 4-SOT-223 0 to 125", Case/Package=SOT-223, Current Rating=800A, Dropout Voltage=1.2V, Manufacturer 1="TI National Semiconductor", Max Input Voltage=15V, Max Operating Temperature=125°C, Max Output Current=800mA, Max Supply Current=10mA, Max Supply Voltage=12V, Min Input Voltage=2.6V, Min Operating Temperature=0°C, Nominal Output Voltage=5V, Output Voltage Accuracy=1%, Package Quantity=1000, Power Supply Rejection Ratio (PSRR)=75dB, Quiescent Current=5mA, Accuracy=1%, ComponentLink1Description=https://datasheet.ciiva.com/15111/getdatasheetpartid-68363-15111331.pdf?src-supplier=Verical, ComponentLink1URL=https://datasheet.ciiva.com/15111/getdatasheetpartid-68363-15111331.pdf?src-supplier=Verical, ComponentLink2Description=https://datasheet.ciiva.com/14149/lm1117-eng-tds-14149981.pdf?src-supplier=Distrelec, ComponentLink2URL=https://datasheet.ciiva.com/14149/lm1117-eng-tds-14149981.pdf?src-supplier=Distrelec, ComponentLink3Description=https://datasheet.ciiva.com/25980/lm1117-n-25980317.pdf?src-supplier=Avnet+Europe, ComponentLink3URL=https://datasheet.ciiva.com/25980/lm1117-n-25980317.pdf?src-supplier=Avnet+Europe, ComponentLink4Description=https://datasheet.ciiva.com/6580/lm1117-n-6580058.pdf?src-supplier=Digi-Key, ComponentLink4URL=https://datasheet.ciiva.com/6580/lm1117-n-6580058.pdf?src-supplier=Digi-Key, ComponentLink5Description=https://datasheet.ciiva.com/6580/lm1117-n-6580053.pdf?src-supplier=Digi-Key, ComponentLink5URL=https://datasheet.ciiva.com/6580/lm1117-n-6580053.pdf?src-supplier=Digi-Key, Contact Plating=Tin,Matte, Height=1.6mm, Lead Free="Lead Free", Length=6.5mm, Manufacturer Part Number 1=LM1117MP-5.0/NOPB, Min Current Limit=800mA, Mount="Surface Mount", Number of Outputs=1, Number of Pins=4, Number of Regulators=1, Output Configuration=Positive, Output Current=800mA, Output Type=Fixed, Output Voltage=5V, Packaging="Tape and Reel", Polarity=Positive, Pricing 1="1=1,08320, 1000=0,48480 (USD)", Radiation Hardening=No, REACH SVHC="No SVHC", RoHS=Yes, RoHS Compliant=Yes, Series=-, Stock 1=2, Supplier 1="Arrow Electronics", Supplier Part Number 1=LM1117MP-5.0/NOPB, Width=3.56mm
U14 U16: "ISL21080 Series 1.5 V 0.5% 300nA NanoPower Voltage Reference - SOT-23-3", Manufacturer 1=Renesas, Supplier Part Number 1=ISL21080CIH315Z-TKCT-ND, ComponentLink1Description=http://www.farnell.com/datasheets/2354212.pdf?src-supplier=Farnell, ComponentLink1URL=http://www.farnell.com/datasheets/2354212.pdf?src-supplier=Farnell, ComponentLink2Description=http://www.farnell.com/datasheets/2354212.pdf?src-supplier=Newark, ComponentLink2URL=http://www.farnell.com/datasheets/2354212.pdf?src-supplier=Newark, ComponentLink3Description=http://www.farnell.com/datasheets/2354212.pdf?src-supplier=Element14, ComponentLink3URL=http://www.farnell.com/datasheets/2354212.pdf?src-supplier=Element14, ComponentLink4Description=http://www.farnell.com/datasheets/1492089.pdf?src-supplier=Newark, ComponentLink4URL=http://www.farnell.com/datasheets/1492089.pdf?src-supplier=Newark, Manufacturer Part Number 1=ISL21080CIH315Z-TK, Pricing 1="1=1,66000, 10=1,48900, 25=1,40440, 100=1,19660, 250=1,12360, 500=0,98316 (USD)", RoHS=Yes, RoHS Compliant=Yes, Stock 1=1020, Supplier 1=Digi-Key
U15: "BATTERY HOLDER COIN 20MM PC PIN", Manufacturer 1="Memory Protection Devices", Max Operating Temperature=105°C, Min Operating Temperature=-55°C, Package Quantity=100, Supplier Part Number 1=BS-7-ND, ComponentLink1Description=https://datasheet.ciiva.com/3/bs-7-datasheet-3824.pdf?src-supplier=Digi-Key, ComponentLink1URL=https://datasheet.ciiva.com/3/bs-7-datasheet-3824.pdf?src-supplier=Digi-Key, Diameter=20mm, Lead Free="Lead Free", Manufacturer Part Number 1=BS-7, Mount="Through Hole,PCB", Number of Cells=1, Pricing 1="1=1,10000, 10=0,92700, 50=0,81480, 100=0,76800, 250=0,70672, 500=0,66344, 1000=0,62018, 2500=0,56249, 5000=0,51922 (USD)", RoHS=Yes, RoHS Compliant=Yes, Stock 1=66566, Supplier 1=Digi-Key, Termination="PC Pin"
Y1: "Crystal 0.032768MHz ±20ppm (Tol) 12.5pF Flexural 70000Ohm 2-Pin CSMD T/R", Case/Package=SMD/SMT, ESR (Equivalent Series Resistance)=70kR, Frequency=32.768kHz, Frequency Tolerance=20ppm, Load Capacitance=12.5pF, Manufacturer 1="ECS International", Max Operating Temperature=125°C, Min Operating Temperature=-40°C, Package Quantity=3000, Supplier Part Number 1=XC1967CT-ND, ComponentLink1Description=https://datasheet.ciiva.com/15047/ecx-34s-15047020.pdf?src-supplier=Digi-Key, ComponentLink1URL=https://datasheet.ciiva.com/15047/ecx-34s-15047020.pdf?src-supplier=Digi-Key, ComponentLink2Description=https://datasheet.ciiva.com/15047/ecx-34s-15047021.pdf?src-supplier=Digi-Key, ComponentLink2URL=https://datasheet.ciiva.com/15047/ecx-34s-15047021.pdf?src-supplier=Digi-Key, ComponentLink3Description=https://datasheet.ciiva.com/15047/ecx-34s-15047022.pdf?src-supplier=Digi-Key, ComponentLink3URL=https://datasheet.ciiva.com/15047/ecx-34s-15047022.pdf?src-supplier=Digi-Key, Height=0.035inch, Lead Free="Lead Free", Lead Pitch=1.8mm, Length=0.126inch, Manufacturer Part Number 1=ECS-.327-12.5-34S-TR, Mount="Surface Mount", Number of Pins=2, Packaging="Tape and Reel", Pricing 1="1=1,37000, 10=1,21400, 50=1,13520, 100=1,00320, 500=0,95040, 1000=0,79200 (USD)", RoHS=Yes, RoHS Compliant=Yes, Series=ECX-34S, Stock 1=0, Supplier 1=Digi-Key, Termination=SMD/SMT, Tolerance=20ppm, Width=1.5mm
Y2: "CRYSTAL 12.0000MHZ 20PF SMD", ESR (Equivalent Series Resistance)=60R, Frequency=12MHz, Frequency Stability=50ppm, Frequency Tolerance=30ppm, Load Capacitance=20pF, Manufacturer 1="ECS International", Max Operating Temperature=70°C, Min Operating Temperature=-10°C, Package Quantity=1, Supplier Part Number 1=XC1770CT-ND, ComponentLink1Description=https://datasheet.ciiva.com/852/csm-3x-852331.pdf?src-supplier=Digi-Key, ComponentLink1URL=https://datasheet.ciiva.com/852/csm-3x-852331.pdf?src-supplier=Digi-Key, ComponentLink2Description=https://datasheet.ciiva.com/852/csm-3x-852332.pdf?src-supplier=Digi-Key, ComponentLink2URL=https://datasheet.ciiva.com/852/csm-3x-852332.pdf?src-supplier=Digi-Key, ComponentLink3Description=https://datasheet.ciiva.com/852/csm-3x-852333.pdf?src-supplier=Digi-Key, ComponentLink3URL=https://datasheet.ciiva.com/852/csm-3x-852333.pdf?src-supplier=Digi-Key, Height=0.091inch, Lead Free="Lead Free", Length=0.276inch, Manufacturer Part Number 1=ECS-120-20-3X-TR, Mount="Surface Mount", Number of Pins=2, Packaging="Tape and Reel", Pricing 1="1=0,34000, 10=0,28800, 50=0,25880, 100=0,23000, 500=0,21850, 1000=0,18400 (USD)", RoHS=Yes, Series=CSM-3X, Stock 1=16869, Supplier 1=Digi-Key, Termination=SMD/SMT, Tolerance=30ppm, Width=4.1mm

## Via types
v1: diameter 0.6, hole 0.6, Top Layer to Bottom Layer, tented top, 7 vias
v2: diameter 0.6, hole 0.406, Top Layer to Bottom Layer, tented top, 5 vias

## Nets (pads, with @x,y where several pads share a name; then routed paths per layer and width w, separated by ;. In a path a pad name is that pad's centre, name@x,y a point inside that pad or via, vN(x,y) a via of type N, cw(c..) or ccw(c..) an arc to the next point about the centre after c; other vN are vias at no path point)
1V8: 
+1V5c: C6.2 C8.2 R7.2 U14.2 | length 12.5
  Top Layer w0.254: C8.2 33.894,89.159 R7.2 32.083,89.156 32.083,81.862 C6.2 32.728,81.801 34.615,81.801 U14.2
+1V5v: C13.2 C47.1 R22.2 U16.2 | length 14.6
  Top Layer w0.254: R22.2 38.735,115.448 C47.1 ; C13.2 42.695,106.784 44.216,106.784 44.356,106.924 44.356,108.425 v1(44.323,108.458) ; C13.2@42.596,106.756 C13.2@42.68,106.84
  Bottom Layer w0.254: v1(38.608,112.903) 38.608,110.871 41.021,108.458 v1(44.323,108.458)
+3V3: ARM_JTAG.1 C14.1 C32.1 C37.1 D1.1 D2.1 D4.2 R25.1 R26.2 R27.2 R28.2 R29.2 R33.2 R35.1 R36.1 R37.1 R38.1 R39.1 R51.2 U4.4 U5.1 U6.2 U6.4 | length 39.3
  Top Layer w0.254: C14.1 73.584,71.425 ARM_JTAG.1 ; U6.2 U6.4 109.546,151.348 111.059,149.835 C37.1 ; C32.1@149.377,70.012 C32.1@149.615,69.774 ; C32.1@150.063,70.113 C32.1 150.003,70.536 U4.4@151.972,70.536 ; R37.1@155.067,92.445 159.032,92.445 R36.1 164.211,92.422 164.389,92.245 169.339,92.245 R39.1 173.66,91.962 R38.1
+3V3_WIFI: C41.1 R52.2 R53.2 R54.1 U11.2 U11.4 U12.8 | length 12.1
  Top Layer w0.254: U11.2 U11.4 99.506,151.715 101.716,149.504 C41.1
+5V: C4.2 C5.2 C12.2 C36.2 C38.1 C40.1 C46.1 C49.1 C50.1 C51.1 C52.1 U1.8 U2.8 U6.1 U8.2 U8.4 U11.1 U13.8 U14.1 U16.1 | length 74.2
  Top Layer w0.254: U14.1 36.744,81.918 39.195,81.918 C5.2 ; U16.1 47.922,106.891 C12.2 ; C52.1 65.156,147.015 C51.1 68.103,146.934 C50.1 70.79,146.858 C49.1 73.985,146.761 U2.8 78.195,146.761 81.818,143.138 97.737,143.138 C40.1@98.09,142.785 ; U11.1 96.481,145.015 97.339,144.156 97.579,144.156 98.09,143.646 C40.1@98.09,142.785 ; U6.1 106.521,139.617 107.417,138.721 107.417,138.506 ; 107.417,138.291 107.417,138.506 ; C36.2 107.541,141.557 107.541,138.631 107.417,138.506 ; U8.4 U8.2 122.217,118.6 122.217,116.766 C38.1 ; C40.1@98.09,142.785 C40.1 98.09,142.355 101.939,138.506 107.417,138.506
+12V: C39.1 U7.3 U8.1 | length 18.6
  Top Layer w0.254: U8.1 119.569,116.212 121.832,113.948 C39.1 ; C39.1@121.832,113.371 121.832,112.023 U7.3
-5V: C54.1 C55.1 C56.1 C57.1 U2.5 | length 20.8
  Top Layer w0.254: C54.1 59.03,155.468 C56.1 61.158,155.448 C55.1 64.158,155.095 71.727,155.095 C57.1 76.251,150.571 U2.5
AC220V: R11.2
AD2: U3.13
AD3: U3.16
AD4: U3.3
AD5: U3.4
AD8: U3.11
AD9: U3.14
ADC1: C1.2 D1.3 R6.2 U1.7 U3.9 | length 12.5
  Top Layer w0.254: U1.7 51.139,92.558 52.15,93.569 R6.2 ; C1.2 52.375,96.566 R6.2 ; D1.3 56.375,92.883 56.037,93.221 52.723,93.221 R6.2
ADC2: C10.2 D2.3 R21.2 U3.10 U13.7 | length 13.5
  Top Layer w0.254: U13.7 51.366,117.094 51.714,117.442 51.366,117.79 51.366,120.345 ; C10.2 49.389,124.409 51.366,122.432 51.366,120.345 ; D2.3 51.417,120.295 51.366,120.345
ADVREF: U3.1 U5.2
AGND: C4.1 C5.1 C6.1 C9.1 C12.1 C13.1 C36.1 C37.2 C38.2 C39.2 C40.2 C41.2 C46.2 C48.1 C49.2 C50.2 C51.2 C52.2 C54.2 C55.2 C56.2 C57.2 D1.2 D2.2 D7.1 R8.2 R9.2 R23.2 R24.2 U1.4 U2.3 U2.6 U6.3 U7.4 U8.3 U11.3 U13.4 U14.3 U16.3 | length 84.8
  Top Layer w0.254: C6.1 35.583,79.929 U14.3 35.911,79.947 39.51,79.947 C5.1 ; C13.1 42.583,104.864 C13.1@42.908,104.864 ; C13.1@42.596,105.176 C13.1@42.908,104.864 ; C13.1@43.132,104.64 C13.1@42.908,104.864 ; C12.1 47.78,104.747 45.395,104.747 U16.3 45.166,104.864 C13.1@42.908,104.864 ; C54.2 61.087,157.099 C56.2 63.785,157.048 C55.2 71.029,157.028 C57.2 ; C52.2 67.991,148.565 C51.2 68.103,148.514 C50.2 70.79,148.438 C49.2 74.104,148.438 74.967,149.301 U2.6 U2.3 ; C40.2 99.67,143.646 100.18,144.156 100.222,144.156 101.081,145.015 U11.3 ; 108.997,138.291 108.997,138.721 111.121,140.846 111.121,142.088 ; C36.1 109.652,142.088 111.121,142.088 ; C37.2 114.466,148.255 112.007,145.796 111.469,145.796 111.121,145.448 U6.3 111.121,142.088 ; U8.3 124.079,118.858 C38.2 124.432,116.131 124.432,113.744 C39.2 124.612,113.948 125.01,114.346 129.58,114.346 U7.4
  Bottom Layer w0.254: v1(101.448,144.551) 101.93,144.069 v1(110.642,144.069)
"ARM LED1": R34.1 U3.23
"ARM LED2": R30.1 U3.19
DAC1: U3.63
DGND: ARM_JTAG.3 ARM_JTAG.5 ARM_JTAG.9 C14.2 C15.2 C16.2 C17.2 C18.2 C19.2 C20.2 C21.2 C22.2 C24.2 C25.2 C26.2 C27.2 C28.2 C29.2 C30.2 C32.2 Q1.2 Q2.2 R31.1 R32.1 U3.2 U3.17 U3.46 U3.60 U4.3 U4.6 U4.G1 U4.G2 U15.1 | length 58.5
  Top Layer w0.254: C14.2 73.564,70.129 v1(75.87,70.129) ; ARM_JTAG.5 ARM_JTAG.3 ; U15.1 92.785,38.303 99.988,45.506 C16.2 100.223,45.526 C17.2 102.641,45.501 C18.2 105.105,45.424 C19.2 C20.2 109.931,45.374 C21.2 ; C29.2 115.956,57.729 C30.2 ; U3.2 121.519,46.728 121.826,46.42 v1(121.92,46.42) ; U3.17@122.455,37.455 122.455,37.619 122.486,37.65 U3.17 ; C24.2 127.965,57.596 C25.2 130.785,57.545 C26.2 133.426,57.418 C27.2 135.992,57.342 C28.2 ; C22.2 137.846,34.498 v2(137.846,33.264) C15.2 ; C32.2@150.012,72.038 U4.3@151.921,72.038
  other v1: 75.997,66.319
ERASE: U3.55
GND: U5.3
GND_WIFI: R55.1 U12.15
NetC1_23: C1.1 R3.2 R4.2 R8.1 | length 15.9
  Top Layer w0.254: R3.2 42.083,98.527 R8.1 45.634,98.395 45.639,98.4 R4.2 52.126,98.395 C1.1
NetC2_22: C2.1 R1.1 R3.1 U1.1 | length 14.2
  Top Layer w0.254: R1.1 34.275,96.236 C2.1 ; R3.1@34.473,98.654 R3.1 34.595,98.522 C2.1 ; U1.1 39.167,93.828 37.079,95.916 C2.1
NetC2_23: C2.2 R1.2 R2.2 U1.2 | length 15.1
  Top Layer w0.254: R2.2 R1.2 C2.2 34.81,94.336 36.588,92.558 U1.2
NetC3_22: R2.1
NetC7_22: R5.1
NetC8_22: C8.1 R5.2 R7.1 U1.3 | length 10.8
  Top Layer w0.254: R5.2 31.953,90.932 R7.1 ; C8.1@34.468,91.288 U1.3
NetC9_22: C9.2 R4.1 U1.5 | length 10.6
  Top Layer w0.254: R4.1 45.644,94.463 45.39,94.209 45.39,92.247 47.619,90.018 U1.5 ; R4.1@46.152,96.5 46.284,96.368 C9.2 C9.2@48.692,96.312
NetC10_23: C10.1 R15.2 R16.2 R23.1 | length 6.4
  Top Layer w0.254: R15.2 46.858,122.682 R23.1 ; R16.2 46.914,120.95 R23.1 ; C10.1 49.083,122.738 R23.1
NetC11_22: C11.1 R10.1 R15.1 U13.1 | length 8.6
  Top Layer w0.254: U13.1 42.709,119.07 42.644,119.135 42.644,120.424 C11.1 42.545,121.031 R10.1 44.674,124.587 R15.1
NetC11_23: C11.2 R10.2 R14.1 U13.2 | length 9.1
  Top Layer w0.254: R10.2 40.711,124.521 C11.2 40.711,118.694 R14.1 40.508,118.266 40.856,117.918 41.081,117.918 41.707,117.292 42.511,117.292 U13.2
NetC15_22: C15.1 U3.31 Y1.2 | length 11
  Top Layer w0.254: 129.478,36.711 129.478,36.334 131.699,34.112 131.699,32.288 131.816,32.171 Y1.2 136.124,32.171 C15.1 ; 129.486,36.711 U3.31
NetC16_23: C16.1 C17.1 C18.1 C19.1 C20.1 C21.1 D4.1 D5.1 U3.7 U3.18 U3.45 U3.58 | length 54.8
  Top Layer w0.254: D5.1 97.663,47.137 97.736,47.064 100.181,47.064 C16.1 100.223,47.106 C17.1 102.641,47.081 C18.1 105.105,47.004 C19.1 C20.1 109.931,46.954 C21.1 116.652,46.954 119.356,44.249 120.475,44.249 120.477,44.247 121.876,44.247 ; U3.18 122.986,43.138 121.876,44.247 ; U3.58 125.486,45.323 124.409,44.247 121.876,44.247 ; v2(130.531,45.745) 130.548,45.728 U3.45
  Bottom Layer w0.254: v2(125.654,45.822) 125.692,45.783 130.493,45.783 v2(130.531,45.745)
NetC22_22: C22.1 U3.32 Y1.1 | length 8.2
  Top Layer w0.254: 129.986,36.621 U3.32 ; 129.994,36.711 131.611,35.094 132.724,35.094 Y1.1 136.093,34.671 C22.1
NetC24_23: C24.1 C25.1 C26.1 C27.1 C28.1 L1.1 U3.8 U3.12 U3.24 U3.54 | length 44.8